# Altium PCB osc_evo.PcbDoc (part 2 of 5)
Units mm, origin at the board's own origin, x right, y up, seen from the top; angles counter-clockwise.
Board outline 145 x 85 mm, 4 copper layers (Top Layer, Mid-Layer 1, Mid-Layer 2, Bottom Layer); 114 components, 170 nets, 648 pads, 625 vias.
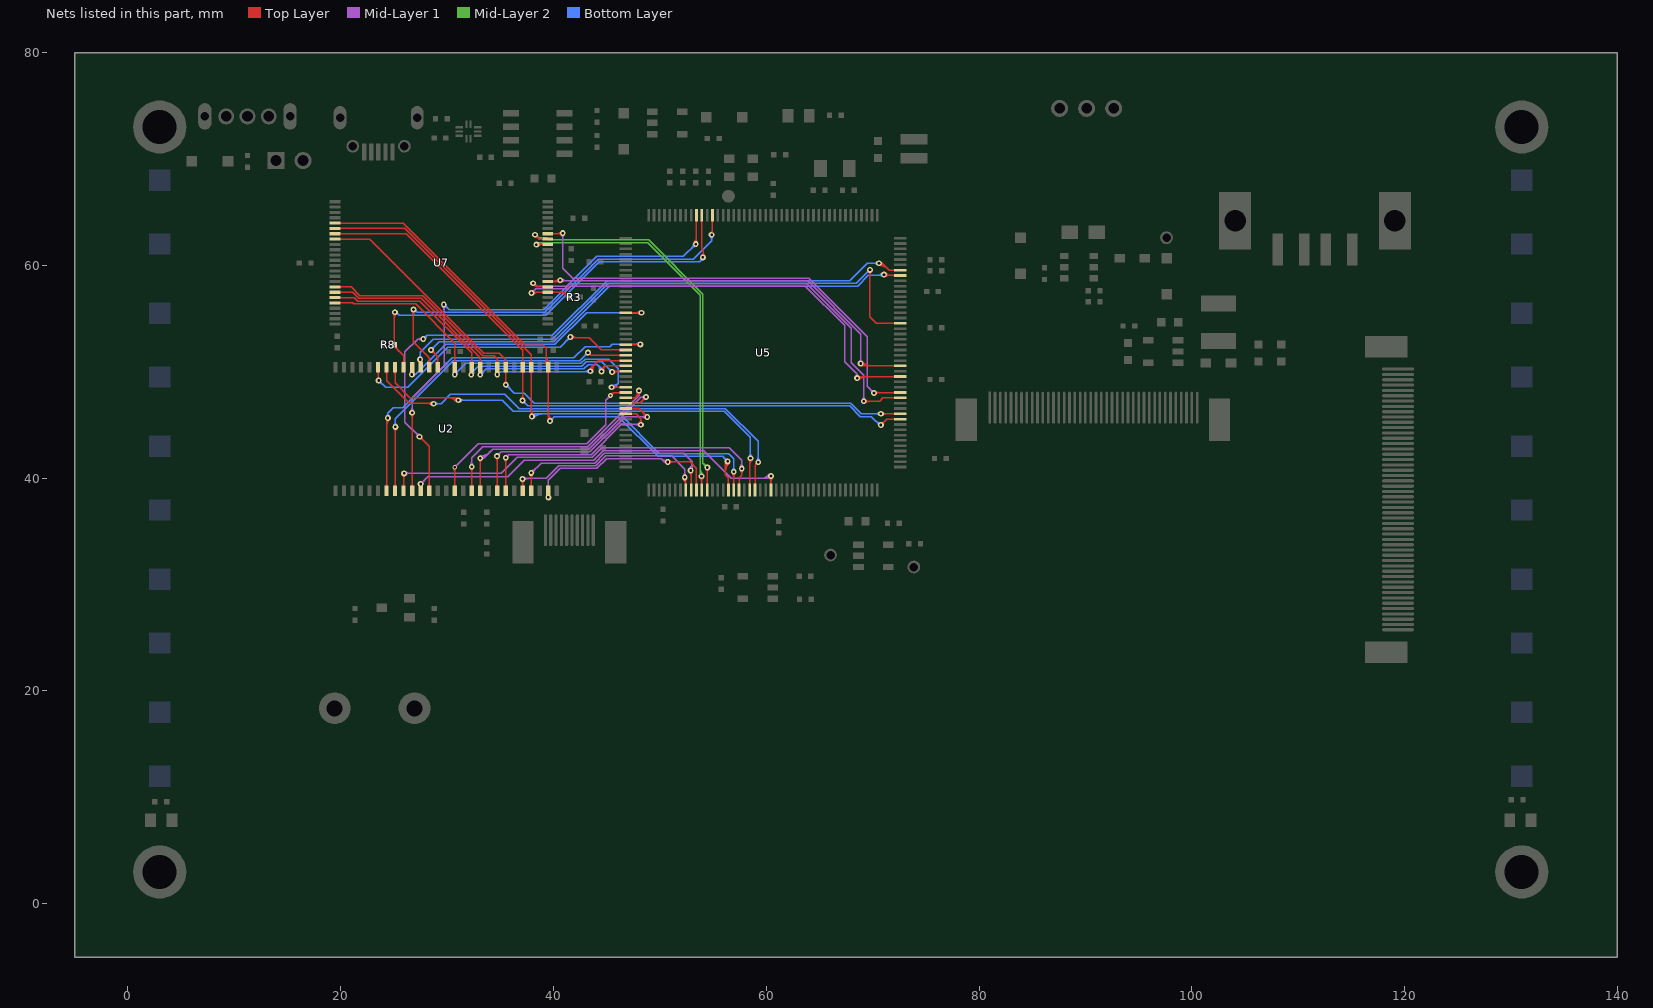
[diagram p4: the nets of this part, all layers, seen from the top]

## Via types
v1: diameter 0.55, hole 0.25, Top Layer to Bottom Layer, tented both sides, 463 vias
v2: diameter 0.55, hole 0.25, Top Layer to Bottom Layer, 156 vias
v3: diameter 0.45, hole 0.2, Top Layer to Bottom Layer, tented both sides, 4 vias
v4: diameter 1.5, hole 1.5, Top Layer to Bottom Layer, tented both sides, 2 vias

## Nets (pads, with @x,y where several pads share a name; then routed paths per layer and width w, separated by ;. In a path a pad name is that pad's centre, name@x,y a point inside that pad or via, vN(x,y) a via of type N, cw(c..) or ccw(c..) an arc to the next point about the centre after c; other vN are vias at no path point) (continued)
FMC-A9: U2.34 U5.65 | length 39.4
  Top Layer w0.127: U2.34@24.229,39.222 ccw(c23.995,39.455) 24.325,39.455 ccw(c24.655,39.455) U2.34@24.422,39.222 ; U2.34@24.325,38.825 24.325,45.525 v1(24.45,45.65) ; 24.325,44.838 cw(c25.262,44.838) v1@24.6,45.5 ; 24.325,45.144 cw(c24.956,45.144) v1@24.51,45.59 ; U5.65@46.8,52.55 48.15,52.55 v1(48.175,52.575) ; U5.65@47.319,52.507 cw(c47.424,52.402) 47.424,52.55 cw(c47.424,52.698) U5.65@47.319,52.594 ; 47.604,52.55 ccw(c47.604,53.146) v1@48.025,52.725 ; 47.725,52.55 cw(c47.725,52.125) v1@48.025,52.425
  Bottom Layer w0.127: v1@24.311,45.81 ccw(c24.049,46.113) 24.45,46.113 ; v1(24.45,45.65) 24.45,46.113 ; v1@24.589,45.81 cw(c24.851,46.113) 24.45,46.113 ; 47.604,52.6 cw(c47.604,52.004) v1@48.025,52.425 ; 47.725,52.6 ccw(c47.725,53.025) v1@48.025,52.725 ; v1(48.175,52.575) 48,52.575 47.975,52.6 45.525,52.6 45.275,52.35 42.975,52.35 41.92,51.295 30.507,51.295 25.837,46.625 24.962,46.625 24.45,46.113
FMC-A10: U2.22 U5.66 | length 32.1
  Top Layer w0.127: v1@23.425,49.325 ccw(c23.185,49.565) 23.525,49.565 ; U2.22@23.429,50.028 cw(c23.195,49.795) 23.525,49.795 cw(c23.855,49.795) U2.22@23.622,50.028 ; 23.525,49.5 ccw(c23.9,49.5) v1@23.635,49.235 ; 23.525,49.806 ccw(c24.206,49.806) v1@23.725,49.325 ; U2.22@23.525,50.425 23.525,49.075 23.538,49.063 23.575,49.1 v1(23.575,49.175) ; v1(41.6,53.275) 41.69,53.185 43.366,53.185 44.5,52.05 U5.66@46.8,52.05 ; v1@41.66,53.335 ccw(c42.022,53.697) 42.022,53.185 ; v1@41.75,53.125 cw(c41.892,52.983) 41.892,53.185 ; v1@41.75,53.425 ccw(c42.329,54.004) 42.329,53.185 ; U5.66@46.282,52.007 ccw(c46.177,51.902) 46.177,52.05 ccw(c46.177,52.198) U5.66@46.282,52.094
  Bottom Layer w0.127: v1@23.575,48.964 cw(c23.575,48.453) 23.936,48.814 cw(c24.297,49.175) v1@23.786,49.175 ; v1(23.575,49.175) 24.225,48.525 26.3,48.525 30.086,52.311 40.636,52.311 v1(41.6,53.275) ; v1@41.389,53.275 cw(c40.878,53.275) 41.239,52.914 cw(c41.6,52.553) v1@41.6,53.064
FMC-A11: U2.35 U5.67 | length 34.8
  Top Layer w0.127: v1@25,44.675 cw(c24.7,44.375) 25.125,44.375 ; U2.35@25.029,39.222 ccw(c24.795,39.455) 25.125,39.455 ccw(c25.455,39.455) U2.35@25.222,39.222 ; U2.35@25.125,38.825 25.125,44.85 25.15,44.875 v1(25.15,44.825) ; 25.125,44.254 cw(c25.721,44.254) v1@25.3,44.675 ; v1(43.25,51.8) 43.5,51.55 ; v1@43.311,51.598 cw(c43.366,51.416) 43.5,51.55 ; v1@43.452,51.739 ccw(c43.634,51.684) 43.5,51.55 ; U5.67@46.282,51.507 ccw(c46.177,51.402) 46.177,51.55 ccw(c46.177,51.698) U5.67@46.282,51.594 ; U5.67@46.8,51.55 43.5,51.55
  Bottom Layer w0.127: v1@25,44.975 ccw(c24.639,45.336) 25.15,45.336 ccw(c25.661,45.336) v1@25.3,44.975 ; v1(25.15,44.825) 25.15,45.579 30.612,51.041 42.473,51.041 43.232,51.8 v1(43.25,51.8) ; 42.858,51.426 cw(c43.25,51.033) v1@43.25,51.589 ; 42.902,51.47 ccw(c42.572,51.8) v1@43.039,51.8
FMC-A12: U2.36 U5.106 | length 42
  Top Layer w0.127: v1@25.825,40.3 cw(c25.585,40.06) 25.925,40.06 ; U2.36@25.829,39.222 ccw(c25.595,39.455) 25.925,39.455 ccw(c26.255,39.455) U2.36@26.022,39.222 ; U2.36@25.925,38.825 25.925,40.4 v1(25.975,40.45) ; 25.925,39.819 cw(c26.606,39.819) v1@26.125,40.3 ; 25.925,40.125 cw(c26.3,40.125) v1@26.035,40.39 ; U5.106@57.407,39.419 ccw(c57.302,39.523) 57.45,39.523 ccw(c57.599,39.524) U5.106@57.494,39.419 ; U5.106@57.45,38.9 57.45,40.025 57.7,40.275 v1(57.7,40.9) ; v1@57.55,40.75 cw(c57.189,40.389) 57.7,40.389 cw(c58.211,40.389) v1@57.85,40.75
  Mid-Layer 1 w0.127: v1(25.975,40.45) 35.1,40.45 36.605,41.955 43.651,41.955 44.546,42.85 56.55,42.85 57.7,41.7 v1(57.7,40.9) ; v1@26.125,40.3 cw(c26.486,39.939) 26.486,40.45 cw(c26.486,40.961) v1@26.125,40.6 ; v1@57.55,41.05 ccw(c57.189,41.411) 57.7,41.411 ccw(c58.211,41.411) v1@57.85,41.05
FMC-ALE: U5.100 U7.17 | length 41.6
  Top Layer w0.127: v1@38.275,62.664 cw(c38.275,62.153) 38.636,62.514 cw(c38.997,62.875) v1@38.486,62.875 ; v1(38.275,62.875) 38.675,62.475 U7.17@39.475,62.475 ; U7.17@39.064,62.414 ccw(c38.916,62.266) 38.916,62.475 ccw(c38.916,62.684) U7.17@39.064,62.536 ; v1@54.325,40.85 cw(c54.025,40.55) 54.45,40.55 ; U5.100@54.407,39.419 ccw(c54.302,39.524) 54.45,39.524 ccw(c54.599,39.524) U5.100@54.494,39.419 ; U5.100@54.45,38.9 54.45,40.975 v1(54.475,41) ; 54.45,40.429 cw(c55.046,40.429) v1@54.625,40.85
  Mid-Layer 2 w0.127: v1(38.275,62.875) 38.3,62.875 38.575,62.6 ; v1@38.326,62.67 cw(c38.389,62.414) 38.575,62.6 ; v1@38.485,62.853 ccw(c38.795,62.821) 38.575,62.6 ; v1@54.264,41 ccw(c53.753,41) 54.114,41.361 ccw(c54.475,41.722) v1@54.475,41.211 ; v1(54.475,41) 54.059,41.416 54.059,57.304 48.963,62.4 39.55,62.4 39.35,62.6 38.575,62.6
FMC-BA0: U2.20 U5.108 | length 48.1
  Top Layer w0.127: U2.20@25.029,50.028 cw(c24.795,49.795) 25.125,49.795 cw(c25.455,49.795) U2.20@25.222,50.028 ; U2.20@25.125,50.425 25.125,48.95 26.525,47.55 30.85,47.55 ; 30.021,47.55 cw(c30.021,46.271) v1@30.925,47.175 ; 30.328,47.55 cw(c30.328,46.578) v1@31.015,47.265 ; 30.634,47.55 cw(c30.634,46.884) v1@31.105,47.355 ; v1@30.879,47.405 ccw(c30.756,47.456) 30.85,47.55 ; v1@30.995,47.521 cw(c30.944,47.644) 30.85,47.55 ; v1(31.075,47.325) 30.85,47.55 ; v1@58.375,41.725 cw(c58.195,41.545) 58.45,41.545 ; U5.108@58.407,39.419 ccw(c58.302,39.524) 58.45,39.524 ccw(c58.598,39.524) U5.108@58.494,39.419 ; U5.108@58.45,38.9 58.45,41.675 v1@58.55,41.775 ; 58.45,41.183 cw(c59.217,41.183) v1@58.675,41.725 ; 58.45,41.49 cw(c58.91,41.49) v1@58.585,41.815
  Bottom Layer w0.127: v1(31.075,47.325) 35.216,47.325 36.249,46.292 56.049,46.292 58.5,43.841 58.5,42.025 58.55,41.975 v1@58.55,41.775 ; v1@31.225,47.175 cw(c31.586,46.814) 31.586,47.325 cw(c31.586,47.836) v1@31.225,47.475 ; v1@58.375,42.025 ccw(c58.075,42.325) 58.5,42.325 ; 58.5,42.446 ccw(c59.096,42.446) v1@58.675,42.025
  other v1: 58.525,41.875
FMC-BA1: U2.21 U5.109 | length 47.6
  Top Layer w0.127: U2.21@24.229,50.028 cw(c23.995,49.795) 24.325,49.795 cw(c24.655,49.795) U2.21@24.422,50.028 ; U2.21@24.325,50.425 24.325,49.15 26.45,47.025 v1@28.625,47.025 ; 28.179,47.025 cw(c28.179,46.429) v1@28.6,46.85 ; 28.3,47.025 ccw(c28.3,47.45) v1@28.6,47.15 ; U5.109@58.907,39.419 ccw(c58.802,39.524) 58.95,39.524 ccw(c59.098,39.524) U5.109@58.994,39.419 ; U5.109@58.95,38.9 58.95,41.2 ; v1@59.041,41.471 cw(c58.724,41.426) 58.95,41.2 ; v1@59.221,41.291 ccw(c59.176,40.974) 58.95,41.2 ; v1(59.25,41.5) 58.95,41.2
  Bottom Layer w0.127: v1(28.75,47) 29.45,47 30.325,47.875 35.45,47.875 36.779,46.546 56.154,46.546 59.25,43.45 v1(59.25,41.5) ; v1@28.9,46.85 cw(c29.261,46.489) 29.261,47 cw(c29.261,47.511) v1@28.9,47.15 ; v1@59.1,41.65 ccw(c58.739,42.011) 59.25,42.011 ccw(c59.761,42.011) v1@59.4,41.65
FMC-CAS: U2.17 U5.160 | length 57.6
  Top Layer w0.127: v1@27.336,50.991 cw(c27.001,50.605) 27.51,50.641 cw(c28.02,50.676) v1@27.634,51.011 ; U2.17@27.422,50.815 ccw(c27.227,50.985) v1@27.485,51.003 ; v1(27.475,51.15) U2.17@27.525,50.425 ; v1@27.478,51.102 ccw(c27.877,51.13) U2.17@27.615,50.828 ; v1@69.6,59.425 cw(c69.239,59.064) 69.75,59.064 cw(c70.261,59.064) v1@69.9,59.425 ; v1(69.75,59.575) 69.75,55.15 70.35,54.55 U5.160@72.6,54.55 ; U5.160@72.082,54.507 ccw(c71.977,54.402) 71.977,54.55 ccw(c71.977,54.698) U5.160@72.082,54.594
  Bottom Layer w0.127: v1@27.325,51.3 ccw(c26.964,51.661) 27.475,51.661 ccw(c27.986,51.661) v1@27.625,51.3 ; v1(27.475,51.15) 27.475,51.825 28.723,53.073 39.915,53.073 45.146,58.304 68.479,58.304 v1(69.75,59.575)
FMC-CKE: U2.37 U5.35 | length 53.9
  Top Layer w0.127: v1@26.575,46 cw(c26.214,45.639) 26.725,45.639 cw(c27.236,45.639) v1@26.875,46 ; U2.37@26.629,39.222 ccw(c26.395,39.455) 26.725,39.455 ccw(c27.055,39.455) U2.37@26.822,39.222 ; U2.37@26.725,38.825 v1(26.725,46.15) ; v1@53.225,62.15 ccw(c52.683,62.692) 53.45,62.692 ; v1@53.315,62.06 ccw(c52.99,62.385) 53.45,62.385 ; v1(53.375,62) 53.45,62.075 U5.35@53.45,64.7 ; U5.35@53.407,64.182 cw(c53.302,64.077) 53.45,64.077 cw(c53.599,64.077) U5.35@53.494,64.182 ; 53.45,62.329 ccw(c53.704,62.329) v1@53.525,62.15
  Mid-Layer 1 w0.127: v1@26.575,46.3 ccw(c26.214,46.661) 26.725,46.661 ccw(c27.236,46.661) v1@26.875,46.3 ; v1(26.725,46.15) 26.725,47.575 29.725,50.575 v1@29.725,56.325 ; v1@29.55,56.175 cw(c29.129,55.754) 29.725,55.754 ; v1@29.675,56.325 v1(29.7,56.325) ; 29.725,55.875 cw(c30.15,55.875) v1@29.85,56.175
  Bottom Layer w0.127: v1@29.7,56.114 cw(c29.7,55.603) 30.061,55.964 cw(c30.422,56.325) v1@29.911,56.325 ; v1(29.7,56.325) 30.2,55.825 39.075,55.825 44.094,60.844 52.219,60.844 v1(53.375,62) ; v1@53.164,62 cw(c52.653,62) 53.014,61.639 cw(c53.375,61.278) v1@53.375,61.789
FMC-CLE: U5.99 U7.16 | length 42.3
  Top Layer w0.127: v1(38.4,61.95) 38.425,61.975 U7.16@39.475,61.975 ; v1@38.55,61.8 cw(c38.971,61.379) 38.971,61.975 ; v1@38.55,62.1 ccw(c38.85,62.4) 38.85,61.975 ; U7.16@39.064,61.914 ccw(c38.916,61.766) 38.916,61.975 ccw(c38.916,62.184) U7.16@39.064,62.036 ; v1@53.775,40.025 cw(c53.414,39.664) 53.925,39.664 cw(c54.436,39.664) v1@54.075,40.025 ; 53.925,39.584 ccw(c54.159,39.584) U5.99@53.994,39.419 ; v1(53.925,40.175) 53.925,38.925 U5.99@53.95,38.9
  Mid-Layer 2 w0.127: v1@38.37,61.98 cw(c38.72,61.63) 38.72,62.125 ; v1(38.4,61.95) 38.575,62.125 48.879,62.125 53.805,57.199 53.805,40.17 v1@53.95,40.025 ; v1@38.46,61.89 cw(c39.026,61.324) 39.026,62.125 ; v1@38.55,61.8 cw(c39.333,61.017) 39.333,62.125 ; 53.805,40.669 ccw(c54.419,40.669) v1@53.985,40.235 ; 53.805,40.975 ccw(c54.725,40.975) v1@54.075,40.325
FMC-CLK: U2.38 U5.112 | length 42.5
  Top Layer w0.127: U2.38@27.375,39.3 cw(c27.014,38.939) 27.525,38.939 cw(c28.036,38.939) U2.38@27.675,39.3 ; U2.38@27.429,39.222 ccw(c27.206,39.45) v1(27.525,39.45) ; U2.38@27.525,38.825 v1(27.525,39.45) ; U2.38@27.621,39.222 cw(c27.844,39.45) v1(27.525,39.45) ; v1@60.3,40.05 cw(c59.939,39.689) 60.45,39.689 cw(c60.961,39.689) v1@60.6,40.05 ; U5.112@60.407,39.419 ccw(c60.302,39.523) 60.45,39.523 ccw(c60.599,39.524) U5.112@60.494,39.419 ; U5.112@60.45,38.9 v1(60.45,40.2)
  Mid-Layer 1 w0.127: v1(27.525,39.45) 28.2,40.125 35.725,40.125 37.279,41.679 43.776,41.679 44.693,42.596 54.129,42.596 56.725,40 60.25,40 v1(60.45,40.2) ; v1@27.525,39.661 ccw(c27.525,40.172) 27.886,39.811 ccw(c28.247,39.45) v1@27.736,39.45 ; 59.457,40 ccw(c59.457,41.193) v1@60.3,40.35 ; 59.763,40 ccw(c59.763,40.887) v1@60.39,40.26 ; 60.07,40 ccw(c60.07,40.58) v1@60.48,40.17
FMC-CS: R8.1 U2.19 U5.34 | length 47.7
  Top Layer w0.127: R8.1@24.918,52.657 ccw(c24.6,52.975) 25.05,52.975 ccw(c25.5,52.975) R8.1@25.182,52.657 ; v1@24.95,55.45 cw(c24.71,55.21) 25.05,55.21 ; v1@25.025,55.825 25.05,55.8 R8.1@25.05,52.525 25.05,52.375 25.925,51.5 U2.19@25.925,50.425 ; 25.05,54.969 cw(c25.731,54.969) v1@25.25,55.45 ; 25.05,55.275 cw(c25.425,55.275) v1@25.16,55.54 ; R8.1@25.11,52.525 ccw(c25.615,52.525) 25.258,52.167 ; R8.1@25.237,52.525 ccw(c26.049,52.525) 25.474,51.951 ; U2.19@25.829,50.822 ccw(c25.595,51.055) 25.925,51.055 ccw(c26.255,51.055) U2.19@26.022,50.822 ; v1@53.9,60.9 ccw(c53.419,61.381) 54.1,61.381 ; U5.34@53.907,64.182 cw(c53.802,64.077) 53.95,64.077 cw(c54.099,64.077) U5.34@53.994,64.182 ; U5.34@53.95,64.7 53.95,61.55 54.1,61.4 54.1,60.8 v1(54.05,60.75) ; v1@53.99,60.81 ccw(c53.725,61.075) 54.1,61.075 ; 54.1,61.14 ccw(c54.44,61.14) v1@54.2,60.9
  Bottom Layer w0.127: v1@25.025,55.825 25.533,55.317 ; v1@25.128,55.52 cw(c25.211,55.281) 25.39,55.46 ; v1@25.17,55.4 cw(c25.285,55.069) 25.533,55.317 ; v1@25.311,55.6 ccw(c25.46,55.6) 25.355,55.495 ; v1@53.846,60.696 cw(c53.485,60.6) 53.749,60.336 ; 53.882,60.469 cw(c54.05,60.301) v1@54.05,60.539 ; 53.905,60.492 ccw(c53.731,60.665) v1@53.968,60.728 ; v1(54.05,60.75) 54.05,60.637 53.749,60.336 ; 25.533,55.317 39.285,55.317 44.304,60.336 53.749,60.336
  other v1: 25.1,55.6
FMC-DQ0: U2.2 U5.104 U7.29 | length 61.3
  Top Layer w0.127: U7.29@19.475,63.975 25.909,63.975 37.38,52.505 39.045,52.505 39.35,52.2 39.35,50.6 U2.2@39.525,50.425 39.525,45.525 v1(39.675,45.375) ; U7.29@19.886,63.914 cw(c20.034,63.766) 20.034,63.975 cw(c20.034,64.184) U7.29@19.886,64.036 ; U2.2@39.35,50.557 ccw(c39.357,50.557) U2.2@39.352,50.552 ; U2.2@39.35,50.864 ccw(c39.664,50.864) U2.2@39.442,50.642 ; 39.35,51.17 ccw(c39.97,51.17) U2.2@39.532,50.732 ; 39.35,51.477 ccw(c40.277,51.477) U2.2@39.622,50.822 ; U2.2@39.428,50.028 cw(c39.195,49.795) 39.525,49.795 cw(c39.855,49.795) U2.2@39.622,50.028 ; 39.525,45.635 ccw(c39.935,45.635) v1@39.645,45.345 ; 39.525,45.941 ccw(c40.241,45.941) v1@39.735,45.435 ; 39.525,46.248 ccw(c40.548,46.248) v1@39.825,45.525 ; 56.175,40.582 cw(c57.368,40.582) v1@56.525,41.425 ; 56.175,40.888 cw(c57.062,40.888) v1@56.435,41.515 ; 56.175,41.195 cw(c56.755,41.195) v1@56.345,41.605 ; v1@56.189,41.474 cw(c56.116,41.434) 56.175,41.375 ; v1@56.274,41.389 ccw(c56.234,41.316) 56.175,41.375 ; v1(56.375,41.575) 56.175,41.375 ; U5.104@56.407,39.419 ccw(c56.302,39.524) 56.45,39.524 ccw(c56.598,39.524) U5.104@56.494,39.419 ; U5.104@56.45,38.9 56.45,40.025 56.175,40.3 56.175,41.375
  Bottom Layer w0.127: v1(39.675,45.375) 40.084,45.784 46.116,45.784 49.85,42.05 55.9,42.05 v1(56.375,41.575) ; v1@39.675,45.586 ccw(c39.675,46.097) 40.036,45.736 ccw(c40.397,45.375) v1@39.886,45.375 ; v1@56.164,41.575 ccw(c55.653,41.575) 56.014,41.936 ccw(c56.375,42.297) v1@56.375,41.786
FMC-DQ1: U2.4 U5.105 U7.30 | length 59.5
  Top Layer w0.127: U7.30@19.475,63.475 26.05,63.475 37.925,51.6 U2.4@37.925,50.425 37.925,46.075 ; U7.30@19.886,63.414 cw(c20.034,63.266) 20.034,63.475 cw(c20.034,63.684) U7.30@19.886,63.536 ; v1@37.825,45.95 ccw(c37.585,46.19) 37.925,46.19 ; U2.4@37.828,50.028 cw(c37.595,49.795) 37.925,49.795 cw(c38.255,49.795) U2.4@38.022,50.028 ; U2.4@37.828,50.822 ccw(c37.595,51.055) 37.925,51.055 ccw(c38.255,51.055) U2.4@38.022,50.822 ; v1@37.872,45.985 ccw(c37.822,46.075) 37.925,46.075 ; 37.925,46.125 ccw(c38.3,46.125) v1@38.035,45.86 ; 37.925,46.431 ccw(c38.606,46.431) v1@38.125,45.95 ; v1@37.986,46.011 cw(c37.989,46.075) 37.925,46.075 ; v1@56.8,40.45 cw(c56.439,40.089) 56.95,40.089 cw(c57.461,40.089) v1@57.1,40.45 ; U5.105@56.907,39.419 ccw(c56.802,39.524) 56.95,39.524 ccw(c57.098,39.524) U5.105@56.994,39.419 ; U5.105@56.95,38.9 v1(56.95,40.6)
  Bottom Layer w0.127: v1@37.945,45.83 cw(c38.447,45.328) 38.447,46.038 ; v1(37.975,45.8) 38.213,46.038 46.221,46.038 49.955,42.304 56.471,42.304 56.95,41.825 v1(56.95,40.6) ; v1@38.035,45.74 cw(c38.754,45.021) 38.754,46.038 ; v1@38.125,45.65 cw(c39.06,44.715) 39.06,46.038 ; v1@56.8,40.75 ccw(c56.439,41.111) 56.95,41.111 ccw(c57.461,41.111) v1@57.1,40.75
FMC-DQ2: U2.5 U5.142 U7.31 | length 68.8
  Top Layer w0.127: U7.31@19.475,62.975 26.191,62.975 37.125,52.041 U2.5@37.125,50.425 37.125,47.325 v1(37.1,47.3) ; U7.31@19.886,62.914 cw(c20.034,62.766) 20.034,62.975 cw(c20.034,63.184) U7.31@19.886,63.036 ; v1@36.95,47.45 ccw(c36.529,47.871) 37.125,47.871 ; U2.5@37.028,50.028 cw(c36.795,49.795) 37.125,49.795 cw(c37.455,49.795) U2.5@37.222,50.028 ; U2.5@37.028,50.822 ccw(c36.795,51.055) 37.125,51.055 ccw(c37.455,51.055) U2.5@37.222,50.822 ; 37.125,47.75 ccw(c37.55,47.75) v1@37.25,47.45 ; v1(70.775,45) 71.325,45.55 U5.142@72.6,45.55 ; v1@70.775,45.211 ccw(c70.775,45.722) 71.136,45.361 ccw(c71.497,45) v1@70.986,45 ; U5.142@72.082,45.507 ccw(c71.977,45.402) 71.977,45.55 ccw(c71.977,45.699) U5.142@72.082,45.594
  Bottom Layer w0.127: v1@37.1,47.089 cw(c37.1,46.578) 37.461,46.939 cw(c37.822,47.3) v1@37.311,47.3 ; v1(37.1,47.3) 37.6,46.8 67.841,46.8 68.845,45.796 69.854,45.796 70.65,45 v1(70.775,45) ; 70.201,45.449 ccw(c70.775,46.024) v1@70.775,45.211 ; 70.417,45.233 ccw(c70.775,45.59) v1@70.775,45.084 ; 70.502,45.148 cw(c70.355,45) v1@70.564,45
FMC-DQ3: U2.7 U5.143 U7.32 | length 66.1
  Top Layer w0.127: U7.32@19.475,62.475 22.743,62.475 33.464,51.754 34.896,51.754 35.525,51.125 U2.7@35.525,50.425 v1(35.525,48.775) ; U7.32@19.886,62.414 cw(c20.034,62.266) 20.034,62.475 cw(c20.034,62.684) U7.32@19.886,62.536 ; v1@35.375,48.925 ccw(c35.014,49.286) 35.525,49.286 ccw(c36.036,49.286) v1@35.675,48.925 ; U2.7@35.428,50.028 cw(c35.195,49.795) 35.525,49.795 cw(c35.855,49.795) U2.7@35.622,50.028 ; U2.7@35.428,50.822 ccw(c35.195,51.055) 35.525,51.055 ccw(c35.855,51.055) U2.7@35.622,50.822 ; v1(70.775,46.05) U5.143@72.6,46.05 ; v1@70.925,45.9 cw(c71.286,45.539) 71.286,46.05 cw(c71.286,46.561) v1@70.925,46.2 ; U5.143@72.082,46.007 ccw(c71.977,45.902) 71.977,46.05 ccw(c71.976,46.199) U5.143@72.082,46.094
  Bottom Layer w0.127: v1@35.525,48.564 cw(c35.525,47.993) 35.929,48.396 ; v1(35.525,48.775) 35.55,48.775 36.325,48 37.275,48 38.221,47.054 67.946,47.054 68.95,46.05 v1(70.775,46.05) ; v1@35.736,48.775 ccw(c36.187,48.775) 35.868,48.457 ; v1@70.625,45.9 ccw(c70.264,45.539) 70.264,46.05 ccw(c70.264,46.561) v1@70.625,46.2
FMC-DQ4: U2.8 U5.68 U7.41 | length 35.4
  Top Layer w0.127: U7.41@19.475,57.975 20.984,57.975 21.805,57.154 27.705,57.154 33.359,51.5 34.45,51.5 34.725,51.225 U2.8@34.725,50.425 ; U7.41@19.886,57.914 cw(c20.034,57.766) 20.034,57.975 cw(c20.034,58.184) U7.41@19.886,58.036 ; U2.8@34.628,50.822 ccw(c34.395,51.055) 34.725,51.055 ccw(c35.055,51.055) U2.8@34.822,50.822 ; v1@43.432,50.05 cw(c43.933,50.05) 43.579,50.404 ; v1(43.475,50.05) 43.475,50.3 44.225,51.05 U5.68@46.8,51.05 ; v1@43.559,50.05 cw(c44.367,50.05) 43.796,50.621 ; v1@43.686,50.05 cw(c44.801,50.05) 44.013,50.838 ; U5.68@46.282,51.007 ccw(c46.177,50.902) 46.177,51.05 ccw(c46.177,51.198) U5.68@46.282,51.094
  Bottom Layer w0.127: v1(34.725,49.75) 35,50.025 v1@43.475,50.025 ; 42.904,50.025 ccw(c42.904,50.621) v1@43.325,50.2 ; 43.025,50.025 cw(c43.025,49.6) v1@43.325,49.9
FMC-DQ5: U2.10 U5.69 U7.42 | length 38.4
  Top Layer w0.127: U7.42@19.475,57.475 21.125,57.475 21.7,56.9 27.559,56.9 33.125,51.334 U2.10@33.125,50.425 v1@33.125,49.625 ; U7.42@19.886,57.414 cw(c20.034,57.266) 20.034,57.475 cw(c20.034,57.684) U7.42@19.886,57.536 ; v1@32.975,49.875 ccw(c32.614,50.236) 33.125,50.236 ccw(c33.636,50.236) v1@33.275,49.875 ; U2.10@33.028,50.028 cw(c32.795,49.795) 33.125,49.795 cw(c33.455,49.795) U2.10@33.222,50.028 ; U2.10@33.028,50.822 ccw(c32.795,51.055) 33.125,51.055 ccw(c33.455,51.055) U2.10@33.222,50.822 ; v1(44.525,50.025) 44.525,50.225 44.85,50.55 ; v1@44.606,50.048 cw(c44.949,50.145) 44.697,50.397 ; v1@44.728,50.083 cw(c45.187,50.213) 44.85,50.55 ; U5.69@46.282,50.507 ccw(c46.177,50.402) 46.177,50.55 ccw(c46.177,50.698) U5.69@46.282,50.594 ; U5.69@46.8,50.55 44.85,50.55
  Bottom Layer w0.127: v1(33.125,49.725) 33.679,50.279 42.854,50.279 43.254,50.679 44.146,50.679 44.525,50.3 v1(44.525,50.025) ; v1@33.125,49.936 ccw(c33.125,50.447) 33.486,50.086 ccw(c33.847,49.725) v1@33.336,49.725 ; 44.146,50.679 cw(c43.687,50.22) v1@44.319,50.073 ; 44.308,50.517 cw(c43.949,50.159) v1@44.443,50.044 ; 44.469,50.356 cw(c44.211,50.098) v1@44.566,50.015
FMC-DQ6: U2.11 U5.70 U7.43 | length 36.2
  Top Layer w0.127: U7.43@19.475,56.975 21.266,56.975 21.595,56.646 27.454,56.646 32.325,51.775 U2.11@32.325,50.425 ; U7.43@19.886,56.914 cw(c20.034,56.766) 20.034,56.975 cw(c20.034,57.184) U7.43@19.886,57.036 ; U2.11@32.228,50.822 ccw(c31.995,51.055) 32.325,51.055 ccw(c32.655,51.055) U2.11@32.422,50.822 ; v1(45.525,49.975) 45.6,50.05 U5.70@46.8,50.05 ; v1@45.585,49.915 cw(c45.91,49.59) 45.91,50.05 ; v1@45.675,49.825 cw(c46.217,49.283) U5.70@46.217,50.05 ; v1@45.675,50.125 ccw(c45.854,50.304) 45.854,50.05 ; U5.70@46.282,50.007 ccw(c46.177,49.902) 46.177,50.05 ccw(c46.177,50.198) U5.70@46.282,50.094
  Bottom Layer w0.127: v1(32.275,49.725) 32.275,49.875 32.933,50.533 42.683,50.533 43.083,50.933 44.567,50.933 v1(45.525,49.975) ; v1@32.275,49.936 ccw(c32.275,50.085) 32.38,49.98 ; v1@32.359,49.725 cw(c32.926,49.725) 32.525,50.125 ; v1@32.486,49.725 cw(c33.359,49.725) 32.742,50.342 ; v1@45.314,49.975 ccw(c44.803,49.975) 45.164,50.336 ccw(c45.525,50.697) v1@45.525,50.186
FMC-DQ7: U2.13 U5.73 U7.44 | length 41
  Top Layer w0.127: U7.44@19.475,56.475 21.15,56.475 21.25,56.375 27.047,56.375 30.725,52.697 U2.13@30.725,50.425 v1(30.725,49.75) ; U7.44@19.886,56.414 cw(c20.034,56.266) 20.034,56.475 cw(c20.034,56.684) U7.44@19.886,56.536 ; v1@30.575,49.9 ccw(c30.214,50.261) 30.725,50.261 ccw(c31.236,50.261) v1@30.875,49.9 ; U2.13@30.628,50.028 cw(c30.395,49.795) 30.725,49.795 cw(c31.055,49.795) U2.13@30.822,50.028 ; U2.13@30.628,50.822 ccw(c30.395,51.055) 30.725,51.055 ccw(c31.055,51.055) U2.13@30.822,50.822 ; v1@45.525,48.5 45.575,48.55 U5.73@46.8,48.55 ; v1@45.625,48.4 cw(c45.986,48.039) 45.986,48.55 ; v1@45.625,48.7 ccw(c45.986,49.061) 45.986,48.55 ; U5.73@46.282,48.507 ccw(c46.177,48.402) 46.177,48.55 ccw(c46.177,48.699) U5.73@46.282,48.594
  Bottom Layer w0.127: v1(30.725,49.75) 31.762,50.787 42.578,50.787 42.978,51.187 45.188,51.187 46.1,50.275 46.1,48.9 ; v1@30.725,49.961 ccw(c30.725,50.472) 31.086,50.111 ccw(c31.447,49.75) v1@30.936,49.75 ; v1@45.463,48.509 ccw(c45.556,48.834) 45.795,48.595 ; v1@45.498,48.631 ccw(c45.624,49.071) 45.947,48.747 ; v1@45.525,48.5 45.7,48.5 46.1,48.9 ; v1@45.533,48.753 ccw(c45.692,49.308) 46.1,48.9
  other v1: 45.475,48.55
FMC-DQ8: U2.42 U5.74 | length 25.8
  Top Layer w0.127: v3@30.611,40.911 cw(c30.335,40.635) 30.725,40.635 cw(c31.115,40.635) v3@30.839,40.911 ; U2.42@30.628,39.222 ccw(c30.395,39.455) 30.725,39.455 ccw(c31.055,39.455) U2.42@30.822,39.222 ; U2.42@30.725,38.825 30.725,41.05 v3(30.725,41.025) ; v3(45.375,47.775) 45.65,48.05 ; v3@45.375,47.936 ccw(c45.376,48.324) 45.65,48.05 ; v3@45.536,47.775 cw(c45.924,47.776) 45.65,48.05 ; U5.74@46.282,48.007 ccw(c46.177,47.902) 46.177,48.05 ccw(c46.177,48.199) U5.74@46.282,48.094 ; U5.74@46.8,48.05 45.65,48.05
  Mid-Layer 1 w0.127: v3(30.725,41.025) 32.925,43.225 43.116,43.225 44.925,45.034 44.925,47.325 v3(45.375,47.775) ; v3@30.725,41.186 ccw(c30.725,41.576) 31.001,41.301 ccw(c31.276,41.025) v3@30.886,41.025 ; v3@45.214,47.775 cw(c44.824,47.775) 45.099,47.499 cw(c45.375,47.224) v3@45.375,47.614
FMC-DQ9: U2.44 U5.75 | length 28.2
  Top Layer w0.127: v1@32.175,40.925 cw(c31.814,40.564) 32.325,40.564 cw(c32.836,40.564) v1@32.475,40.925 ; U2.44@32.228,39.222 ccw(c31.995,39.455) 32.325,39.455 ccw(c32.655,39.455) U2.44@32.422,39.222 ; U2.44@32.325,38.825 v1(32.325,41.075) ; U5.75@46.8,47.55 47.675,47.55 ; U5.75@47.319,47.507 cw(c47.424,47.402) 47.424,47.55 cw(c47.424,47.699) U5.75@47.319,47.594 ; 47.832,47.707 ccw(c47.465,48.075) v1@47.968,48.204 ; v1@47.845,48.172 cw(c47.215,48.01) 47.675,47.55 ; v1@47.979,48.026 cw(c47.943,47.925) 48.05,47.925 ; 47.99,47.865 ccw(c47.716,48.139) v1@48.091,48.236 ; v1(48.05,48.225) 48.05,47.925 ; v1@48.121,48.026 ccw(c48.157,47.925) 48.05,47.925 ; 47.675,47.55 48.05,47.925
  Mid-Layer 1 w0.127: v1@32.175,41.225 ccw(c31.814,41.586) 32.325,41.586 ccw(c32.836,41.586) v1@32.475,41.225 ; v1(32.325,41.075) 32.325,41.925 33.371,42.971 43.221,42.971 48.05,47.8 ; v1@47.922,48.056 cw(c47.729,47.8) 48.05,47.8 ; v1(48.05,48.225) 48.05,47.8 ; v1@48.178,48.056 ccw(c48.371,47.8) 48.05,47.8
FMC-DQ10: U2.45 U5.76 | length 28.9
  Top Layer w0.127: v1@32.975,41.725 cw(c32.614,41.364) 33.125,41.364 cw(c33.636,41.364) v1@33.275,41.725 ; U2.45@33.028,39.222 ccw(c32.795,39.455) 33.125,39.455 ccw(c33.455,39.455) U2.45@33.222,39.222 ; U2.45@33.125,38.825 v1(33.125,41.875) ; U5.76@46.8,47.05 48.125,47.05 v1(48.7,47.625) ; U5.76@47.319,47.007 cw(c47.424,46.902) 47.424,47.05 cw(c47.424,47.199) U5.76@47.319,47.094 ; v1@48.489,47.625 cw(c47.978,47.625) 48.339,47.264 cw(c48.7,46.903) v1@48.7,47.414
  Mid-Layer 1 w0.127: v1@33.125,41.832 ccw(c33.125,42.515) 33.607,42.032 ; v1(33.125,41.875) 33.45,41.875 ; v1@33.125,41.959 ccw(c33.125,42.948) 33.824,42.249 ; v1@33.125,42.086 ccw(c33.125,43.382) 34.041,42.466 ; v1@33.318,41.789 cw(c33.45,41.731) 33.45,41.875 ; v1@33.318,41.961 ccw(c33.45,42.019) 33.45,41.875 ; 48.25,47.6 cw(c48.25,47.175) v1@48.55,47.475 ; v1@48.531,47.752 cw(c48.225,47.984) 48.225,47.6 ; v1(48.7,47.625) 48.725,47.6 48.225,47.6 ; 33.45,41.875 34.292,42.717 43.335,42.717 46.176,45.558 46.183,45.558 48.225,47.6
FMC-DQ11: U2.47 U5.77 | length 25.2
  Top Layer w0.127: v1@34.55,41.925 cw(c34.129,41.504) 34.725,41.504 ; U2.47@34.628,39.222 ccw(c34.395,39.455) 34.725,39.455 ccw(c35.055,39.455) U2.47@34.822,39.222 ; v1(34.7,42.075) 34.725,42.05 U2.47@34.725,38.825 ; 34.725,41.625 cw(c35.15,41.625) v1@34.85,41.925 ; U5.77@46.8,46.55 48.025,46.55 v1(48.825,45.75) ; U5.77@47.319,46.507 cw(c47.424,46.402) 47.424,46.55 cw(c47.424,46.699) U5.77@47.319,46.594 ; v1@48.614,45.75 ccw(c48.103,45.75) 48.464,46.111 ccw(c48.825,46.472) v1@48.825,45.961
  Mid-Layer 1 w0.127: v1(34.7,42.075) 35.088,42.463 43.441,42.463 46.282,45.304 46.288,45.304 46.734,45.75 v1(48.825,45.75) ; v1@34.7,42.286 ccw(c34.7,42.797) 35.061,42.436 ccw(c35.422,42.075) v1@34.911,42.075 ; v1@48.675,45.6 ccw(c48.314,45.239) 48.314,45.75 ccw(c48.314,46.261) v1@48.675,45.9
FMC-DQ12: U2.48 U5.78 | length 23
  Top Layer w0.127: v1@35.375,41.775 cw(c35.014,41.414) 35.525,41.414 cw(c36.036,41.414) v1@35.675,41.775 ; U2.48@35.428,39.222 ccw(c35.195,39.455) 35.525,39.455 ccw(c35.855,39.455) U2.48@35.622,39.222 ; U2.48@35.525,38.825 v1(35.525,41.925) ; U5.78@46.8,46.05 47.775,46.05 48.225,45.6 v1(48.225,45.025) ; U5.78@47.319,46.007 cw(c47.424,45.902) 47.424,46.05 cw(c47.424,46.199) U5.78@47.319,46.094 ; v1@48.075,45.175 ccw(c47.714,45.536) 48.225,45.536 ccw(c48.736,45.536) v1@48.375,45.175
  Mid-Layer 1 w0.127: v1(35.525,41.925) 35.809,42.209 ; v1@35.564,42.133 ccw(c35.614,42.404) 35.809,42.209 ; v1@35.733,41.964 cw(c36.004,42.014) 35.809,42.209 ; 47.654,45.05 cw(c47.654,44.454) v1@48.075,44.875 ; 47.775,45.05 ccw(c47.775,45.475) v1@48.075,45.175 ; v1(48.225,45.025) 48.2,45.05 46.387,45.05 43.546,42.209 35.809,42.209
FMC-DQ13: U2.50 U5.96 | length 24.4
  Top Layer w0.127: v1@36.95,39.775 cw(c36.529,39.354) 37.125,39.354 ; U2.50@37.028,39.222 ccw(c36.795,39.455) 37.125,39.455 ccw(c37.455,39.455) U2.50@37.222,39.222 ; U2.50@37.125,38.825 v1@37.125,39.9 ; 37.125,39.475 cw(c37.55,39.475) v1@37.25,39.775 ; v1@52.2,39.925 cw(c51.598,39.323) U5.96@52.45,39.323 ; v1@52.29,40.015 cw(c51.904,39.629) 52.45,39.629 ; v1(52.35,40.075) 52.45,39.975 U5.96@52.45,38.9 ; U5.96@52.407,39.419 ccw(c52.302,39.524) 52.45,39.524 ccw(c52.599,39.524) U5.96@52.494,39.419 ; 52.45,39.806 cw(c52.619,39.806) v1@52.5,39.925
  Mid-Layer 1 w0.127: v1(37.1,39.925) 37.15,39.975 39.329,39.975 40.525,41.171 43.987,41.171 44.904,42.088 51.112,42.088 52.35,40.85 v1(52.35,40.075) ; v1@37.16,39.865 cw(c37.425,39.6) 37.425,39.975 ; v1@37.25,39.775 cw(c37.731,39.294) 37.731,39.975 ; v1@37.25,40.075 ccw(c37.49,40.315) 37.49,39.975 ; v1@52.2,40.225 ccw(c51.839,40.586) 52.35,40.586 ccw(c52.861,40.586) v1@52.5,40.225
FMC-DQ14: U2.51 U5.97 | length 25.5
  Top Layer w0.127: v1@37.775,40.35 cw(c37.414,39.989) 37.925,39.989 ; U2.51@37.828,39.222 ccw(c37.595,39.455) 37.925,39.455 ccw(c38.255,39.455) U2.51@38.022,39.222 ; U2.51@37.925,38.825 v1(37.925,40.5) ; 37.925,39.989 cw(c38.436,39.989) v1@38.075,40.35 ; v1@52.75,40.575 cw(c52.269,40.094) 52.95,40.094 ; v1@52.84,40.665 cw(c52.575,40.4) 52.95,40.4 ; U5.97@52.907,39.419 ccw(c52.802,39.524) 52.95,39.524 ccw(c53.099,39.524) U5.97@52.994,39.419 ; U5.97@52.95,38.9 v1@52.95,40.625 ; 52.95,40.335 cw(c53.29,40.335) v1@53.05,40.575
  Mid-Layer 1 w0.127: v1(37.925,40.5) 38.85,41.425 43.882,41.425 44.799,42.342 52.233,42.342 53.05,41.525 ; v1@37.925,40.711 ccw(c37.925,41.222) 38.286,40.861 ccw(c38.647,40.5) v1@38.136,40.5 ; v1@52.76,40.884 ccw(c52.196,41.525) 53.05,41.525 ; v1@52.844,40.788 ccw(c52.443,41.244) 53.05,41.244 ; v1@52.928,40.693 ccw(c52.691,40.963) 53.05,40.963 ; v1@53,40.625 53.05,40.675 53.05,41.525
  other v1: 52.9,40.725
FMC-DQ15: U2.53 U5.98 | length 22.4
  Top Layer w0.127: v1(50.75,41.525) 52.85,41.525 53.45,40.925 U5.98@53.45,38.9 ; v1@50.9,41.375 cw(c51.261,41.014) 51.261,41.525 cw(c51.261,42.036) v1@50.9,41.675 ; U5.98@53.407,39.419 ccw(c53.302,39.524) 53.45,39.524 ccw(c53.599,39.524) U5.98@53.494,39.419
  Mid-Layer 1 w0.127: v1@39.375,38.35 ccw(c39.014,38.711) 39.525,38.711 ccw(c40.036,38.711) v1@39.675,38.35 ; v1(39.525,38.2) 39.525,39.792 40.65,40.917 44.092,40.917 45.009,41.834 50.116,41.834 ; 50.252,41.698 ccw(c50.557,42.003) v1@50.718,41.603 ; 50.387,41.563 ccw(c50.635,41.81) v1@50.766,41.486 ; v1@50.544,41.574 cw(c50.45,41.597) 50.45,41.5 ; v1@50.56,41.431 ccw(c50.45,41.377) 50.45,41.5 ; v1@50.671,41.721 cw(c50.479,42.197) 50.116,41.834 ; v1@50.725,41.5 50.45,41.5 ; 50.116,41.834 50.45,41.5
FMC-NBL0: U2.15 U5.169 | length 53.6
  Top Layer w0.127: v1@28.5,51.839 cw(c28.5,51.328) 28.861,51.689 cw(c29.222,52.05) v1@28.711,52.05 ; v1(28.5,52.05) 29.125,51.425 U2.15@29.125,50.425 ; U2.15@29.029,50.822 ccw(c28.795,51.055) 29.125,51.055 ccw(c29.455,51.055) U2.15@29.222,50.822 ; v1(71.075,59.125) 71.15,59.05 U5.169@72.6,59.05 ; v1@71.135,59.185 ccw(c71.46,59.51) 71.46,59.05 ; v1@71.225,58.975 cw(c71.405,58.795) 71.405,59.05 ; v1@71.225,59.275 ccw(c71.767,59.817) 71.767,59.05 ; U5.169@72.082,59.007 ccw(c71.977,58.902) 71.977,59.05 ccw(c71.977,59.198) U5.169@72.082,59.093
  Bottom Layer w0.127: v1(28.5,52.05) 29.269,52.819 40.02,52.819 45.251,58.05 68.584,58.05 69.584,59.05 71,59.05 v1(71.075,59.125) ; v1@28.5,52.261 ccw(c28.5,52.772) 28.861,52.411 ccw(c29.222,52.05) v1@28.711,52.05 ; 70.383,59.05 ccw(c70.383,59.817) v1@70.925,59.275 ; 70.69,59.05 ccw(c70.69,59.51) v1@71.015,59.185 ; 70.745,59.05 cw(c70.745,58.795) v1@70.925,58.975
FMC-NBL1: U2.39 U5.170 | length 71.6
  Top Layer w0.127: v1@27.425,43.689 cw(c27.425,43.178) 27.786,43.539 cw(c28.147,43.9) v1@27.636,43.9 ; v1(27.425,43.9) 28.325,43 U2.39@28.325,38.825 ; U2.39@28.229,39.222 ccw(c27.995,39.455) 28.325,39.455 ccw(c28.655,39.455) U2.39@28.422,39.222 ; v1@70.6,59.989 cw(c70.6,58.693) 71.516,59.609 ; v1@70.6,60.116 cw(c70.6,59.127) 71.299,59.826 ; v1(70.6,60.2) 70.925,60.2 ; v1@70.6,60.243 cw(c70.6,59.56) 71.082,60.043 ; v1@70.793,60.114 cw(c70.925,60.056) 70.925,60.2 ; v1@70.793,60.286 ccw(c70.925,60.344) 70.925,60.2 ; U5.170@72.082,59.507 ccw(c71.977,59.402) 71.977,59.55 ccw(c71.977,59.698) U5.170@72.082,59.593 ; U5.170@72.6,59.55 71.575,59.55 70.925,60.2
  Mid-Layer 1 w0.127: v1@27.214,43.9 ccw(c26.703,43.9) 27.064,44.261 ccw(c27.425,44.622) v1@27.425,44.111 ; v1(27.425,43.9) 26.05,45.275 26.05,51.875 27.25,53.075 v1(27.775,53.075) ; v1@27.625,52.925 ccw(c27.264,52.564) 27.264,53.075 ccw(c27.264,53.586) v1@27.625,53.225
  Bottom Layer w0.127: v1(27.775,53.075) 28.125,53.425 ; v1@27.78,53.286 ccw(c27.79,53.76) 28.125,53.425 ; v1@27.986,53.08 cw(c28.46,53.09) 28.125,53.425 ; v1@70.45,60.05 ccw(c70.089,59.689) 70.089,60.2 ccw(c70.089,60.711) v1@70.45,60.35 ; v1(70.6,60.2) 69.475,60.2 67.833,58.558 45.041,58.558 39.908,53.425 28.125,53.425
FMC-NCE3: U5.152 U7.9 | length 44.7
  Top Layer w0.127: U7.9@39.475,58.475 40.625,58.475 40.75,58.6 v1(40.65,58.6) ; U7.9@39.838,58.475 ccw(c39.838,59.412) v1@40.5,58.75 ; U7.9@39.886,58.414 cw(c40.034,58.266) 40.034,58.475 cw(c40.034,58.684) U7.9@39.886,58.536 ; 40.144,58.475 ccw(c40.144,59.106) v1@40.59,58.66 ; v1@68.845,50.745 ccw(c69.316,51.216) 69.316,50.55 ; v1(68.875,50.775) 69.1,50.55 ; v1@68.935,50.835 ccw(c69.622,51.522) 69.622,50.55 ; v1@68.955,50.579 cw(c69.006,50.456) 69.1,50.55 ; v1@69.025,50.925 ccw(c69.929,51.829) 69.929,50.55 ; v1@69.071,50.695 ccw(c69.194,50.644) 69.1,50.55 ; U5.152@72.082,50.507 ccw(c71.977,50.402) 71.977,50.55 ccw(c71.977,50.698) U5.152@72.082,50.594 ; U5.152@72.6,50.55 69.1,50.55
  Mid-Layer 1 w0.127: v1(40.65,58.6) 40.704,58.546 63.895,58.546 68.9,53.541 68.9,50.8 v1(68.875,50.775) ; v1@40.71,58.66 ccw(c40.984,58.934) 40.984,58.546 ; v1@40.8,58.45 cw(c41.03,58.22) 41.03,58.546 ; v1@40.8,58.75 ccw(c41.291,59.241) 41.291,58.546 ; v1@68.725,50.925 ccw(c68.304,51.346) 68.9,51.346 ; 68.9,51.225 ccw(c69.325,51.225) v1@69.025,50.925
FMC-NOE: U5.146 U7.8 | length 47.2
  Top Layer w0.127: v1(38.1,58.325) 38.45,57.975 ; v1@38.105,58.114 cw(c38.115,57.64) 38.45,57.975 ; v1@38.311,58.32 ccw(c38.785,58.31) 38.45,57.975 ; U7.8@39.064,57.914 ccw(c38.916,57.766) 38.916,57.975 ccw(c38.916,58.184) U7.8@39.064,58.036 ; U7.8@39.475,57.975 38.45,57.975 ; v1(69.175,47.225) 70.65,47.225 70.975,47.55 U5.146@72.6,47.55 ; v1@69.325,47.075 cw(c69.686,46.714) 69.686,47.225 cw(c69.686,47.736) v1@69.325,47.375 ; U5.146@72.082,47.507 ccw(c71.977,47.402) 71.977,47.55 ccw(c71.977,47.699) U5.146@72.082,47.594
  Mid-Layer 1 w0.127: v1(38.1,58.325) 38.375,58.05 41.258,58.05 41.5,58.292 63.79,58.292 68,54.082 68,50.85 69.175,49.675 v1(69.175,47.225) ; v1@69.025,47.375 ccw(c68.664,47.736) 69.175,47.736 ccw(c69.686,47.736) v1@69.325,47.375
FMC-NWAIT: R3.2 U5.150 U7.7 | length 50.2
  Top Layer w0.127: v1(37.95,57.4) 37.95,57.475 38.05,57.575 38.15,57.475 U7.7@39.475,57.475 40.975,57.475 R3.2@41.425,57.025 ; v1@38.01,57.34 cw(c38.335,57.015) 38.335,57.475 ; v1@38.1,57.25 cw(c38.642,56.708) 38.642,57.475 ; v1@38.1,57.55 ccw(c38.28,57.73) 38.28,57.475 ; U7.7@39.064,57.414 ccw(c38.916,57.266) 38.916,57.475 ccw(c38.916,57.684) U7.7@39.064,57.536 ; U7.7@39.886,57.414 cw(c40.034,57.266) 40.034,57.475 cw(c40.034,57.684) U7.7@39.886,57.536 ; R3.2@41.239,57.025 ccw(c40.788,57.025) 41.107,57.343 ccw(c41.425,57.662) R3.2@41.425,57.211 ; v1@68.52,49.43 cw(c68.81,49.14) 68.81,49.55 ; v1(68.55,49.4) 68.7,49.55 U5.150@72.6,49.55 ; v1@68.61,49.34 cw(c69.116,48.834) 69.116,49.55 ; v1@68.7,49.25 cw(c69.423,48.527) 69.423,49.55 ; U5.150@72.082,49.507 ccw(c71.977,49.402) 71.977,49.55 ccw(c71.977,49.698) U5.150@72.082,49.594
  Mid-Layer 1 w0.127: v1(37.95,57.4) 38.346,57.796 41.363,57.796 41.605,58.038 63.684,58.038 67.371,54.351 67.371,50.929 68.55,49.75 ; v1@37.95,57.611 ccw(c37.95,58.122) 38.311,57.761 ccw(c38.672,57.4) v1@38.161,57.4 ; v1@68.452,49.587 ccw(c68.366,49.75) 68.55,49.75 ; v1(68.55,49.4) 68.55,49.75 ; v1@68.648,49.587 cw(c68.734,49.75) 68.55,49.75
FMC-NWE: U5.147 U7.18 | length 48.4
  Top Layer w0.127: U7.18@39.475,62.975 40.825,62.975 v1(40.875,63.025) ; U7.18@39.886,62.914 cw(c40.034,62.766) 40.034,62.975 cw(c40.034,63.184) U7.18@39.886,63.036 ; 40.244,62.975 ccw(c40.244,63.656) v1@40.725,63.175 ; 40.485,62.975 cw(c40.485,62.635) v1@40.725,62.875 ; 40.55,62.975 ccw(c40.55,63.35) v1@40.815,63.085 ; v1(70.125,48) 70.175,48.05 U5.147@72.6,48.05 ; v1@70.185,47.94 cw(c70.45,47.675) 70.45,48.05 ; v1@70.275,47.85 cw(c70.756,47.369) 70.756,48.05 ; v1@70.275,48.15 ccw(c70.515,48.39) 70.515,48.05 ; U5.147@72.082,48.007 ccw(c71.977,47.902) 71.977,48.05 ccw(c71.977,48.199) U5.147@72.082,48.094
  Mid-Layer 1 w0.127: v1@40.725,62.875 cw(c40.364,62.514) 40.875,62.514 cw(c41.386,62.514) v1@41.025,62.875 ; v1(40.875,63.025) 40.875,59.725 41.8,58.8 64,58.8 69.5,53.3 69.5,48.625 v1(70.125,48) ; v1@69.914,48 ccw(c69.403,48) 69.764,48.361 ccw(c70.125,48.722) v1@70.125,48.211
FMC-RAS: U2.18 U5.59 | length 27.8
  Top Layer w0.127: U2.18@26.7,50.4 U2.18@26.725,50.425 ; U5.59@46.8,55.55 v1(48.275,55.55) ; U5.59@47.319,55.507 cw(c47.423,55.402) 47.423,55.55 cw(c47.424,55.699) U5.59@47.319,55.594 ; v1@48.125,55.4 ccw(c47.764,55.039) 47.764,55.55 ccw(c47.764,56.061) v1@48.125,55.7
  Bottom Layer w0.127: v1(26.7,49.75) 27.075,49.75 ; v1@26.881,49.641 cw(c27.075,49.523) 27.075,49.75 ; v1@26.881,49.859 ccw(c27.075,49.977) 27.075,49.75 ; v1@48.125,55.4 ccw(c47.764,55.039) 47.764,55.55 ccw(c47.764,56.061) v1@48.125,55.7 ; v1(48.275,55.55) 43.121,55.55 40.136,52.565 29.89,52.565 27.075,49.75
FMC-WE: U2.16 U5.32 | length 42.5
  Top Layer w0.127: v1@26.7,55.7 cw(c26.339,55.339) 26.85,55.339 cw(c27.361,55.339) v1@27,55.7 ; v1@26.8,56 26.85,55.95 26.85,52.8 28.325,51.325 U2.16@28.325,50.425 ; U2.16@28.229,50.822 ccw(c27.995,51.055) 28.325,51.055 ccw(c28.655,51.055) U2.16@28.422,50.822 ; v1@54.739,63.01 54.95,63.221 U5.32@54.95,64.7 ; U5.32@54.907,64.182 cw(c54.802,64.077) 54.95,64.077 cw(c55.099,64.077) U5.32@54.994,64.182
  Bottom Layer w0.127: v1@26.8,56 27.229,55.571 ; v1@26.914,55.648 cw(c27.008,55.35) 27.229,55.571 ; v1@27.061,55.85 ccw(c27.331,55.85) 27.14,55.66 ; v1@54.725,62.725 cw(c54.364,62.364) 54.875,62.364 cw(c55.386,62.364) v1@55.025,62.725 ; v1(54.875,62.875) 54.875,62.325 53.14,60.59 44.199,60.59 39.18,55.571 27.229,55.571
  other v1: 26.85,55.85